# Altium PCB PCB3.PcbDoc (part 1 of 4)
Units mm, origin at the board's own origin, x right, y up, seen from the top; angles counter-clockwise.
Board outline 160 x 194 mm, 2 copper layers (Top Layer, Bottom Layer); 456 components, 297 nets, 1240 pads, 521 vias.
Unrouted connection lines stored in the file: 258.
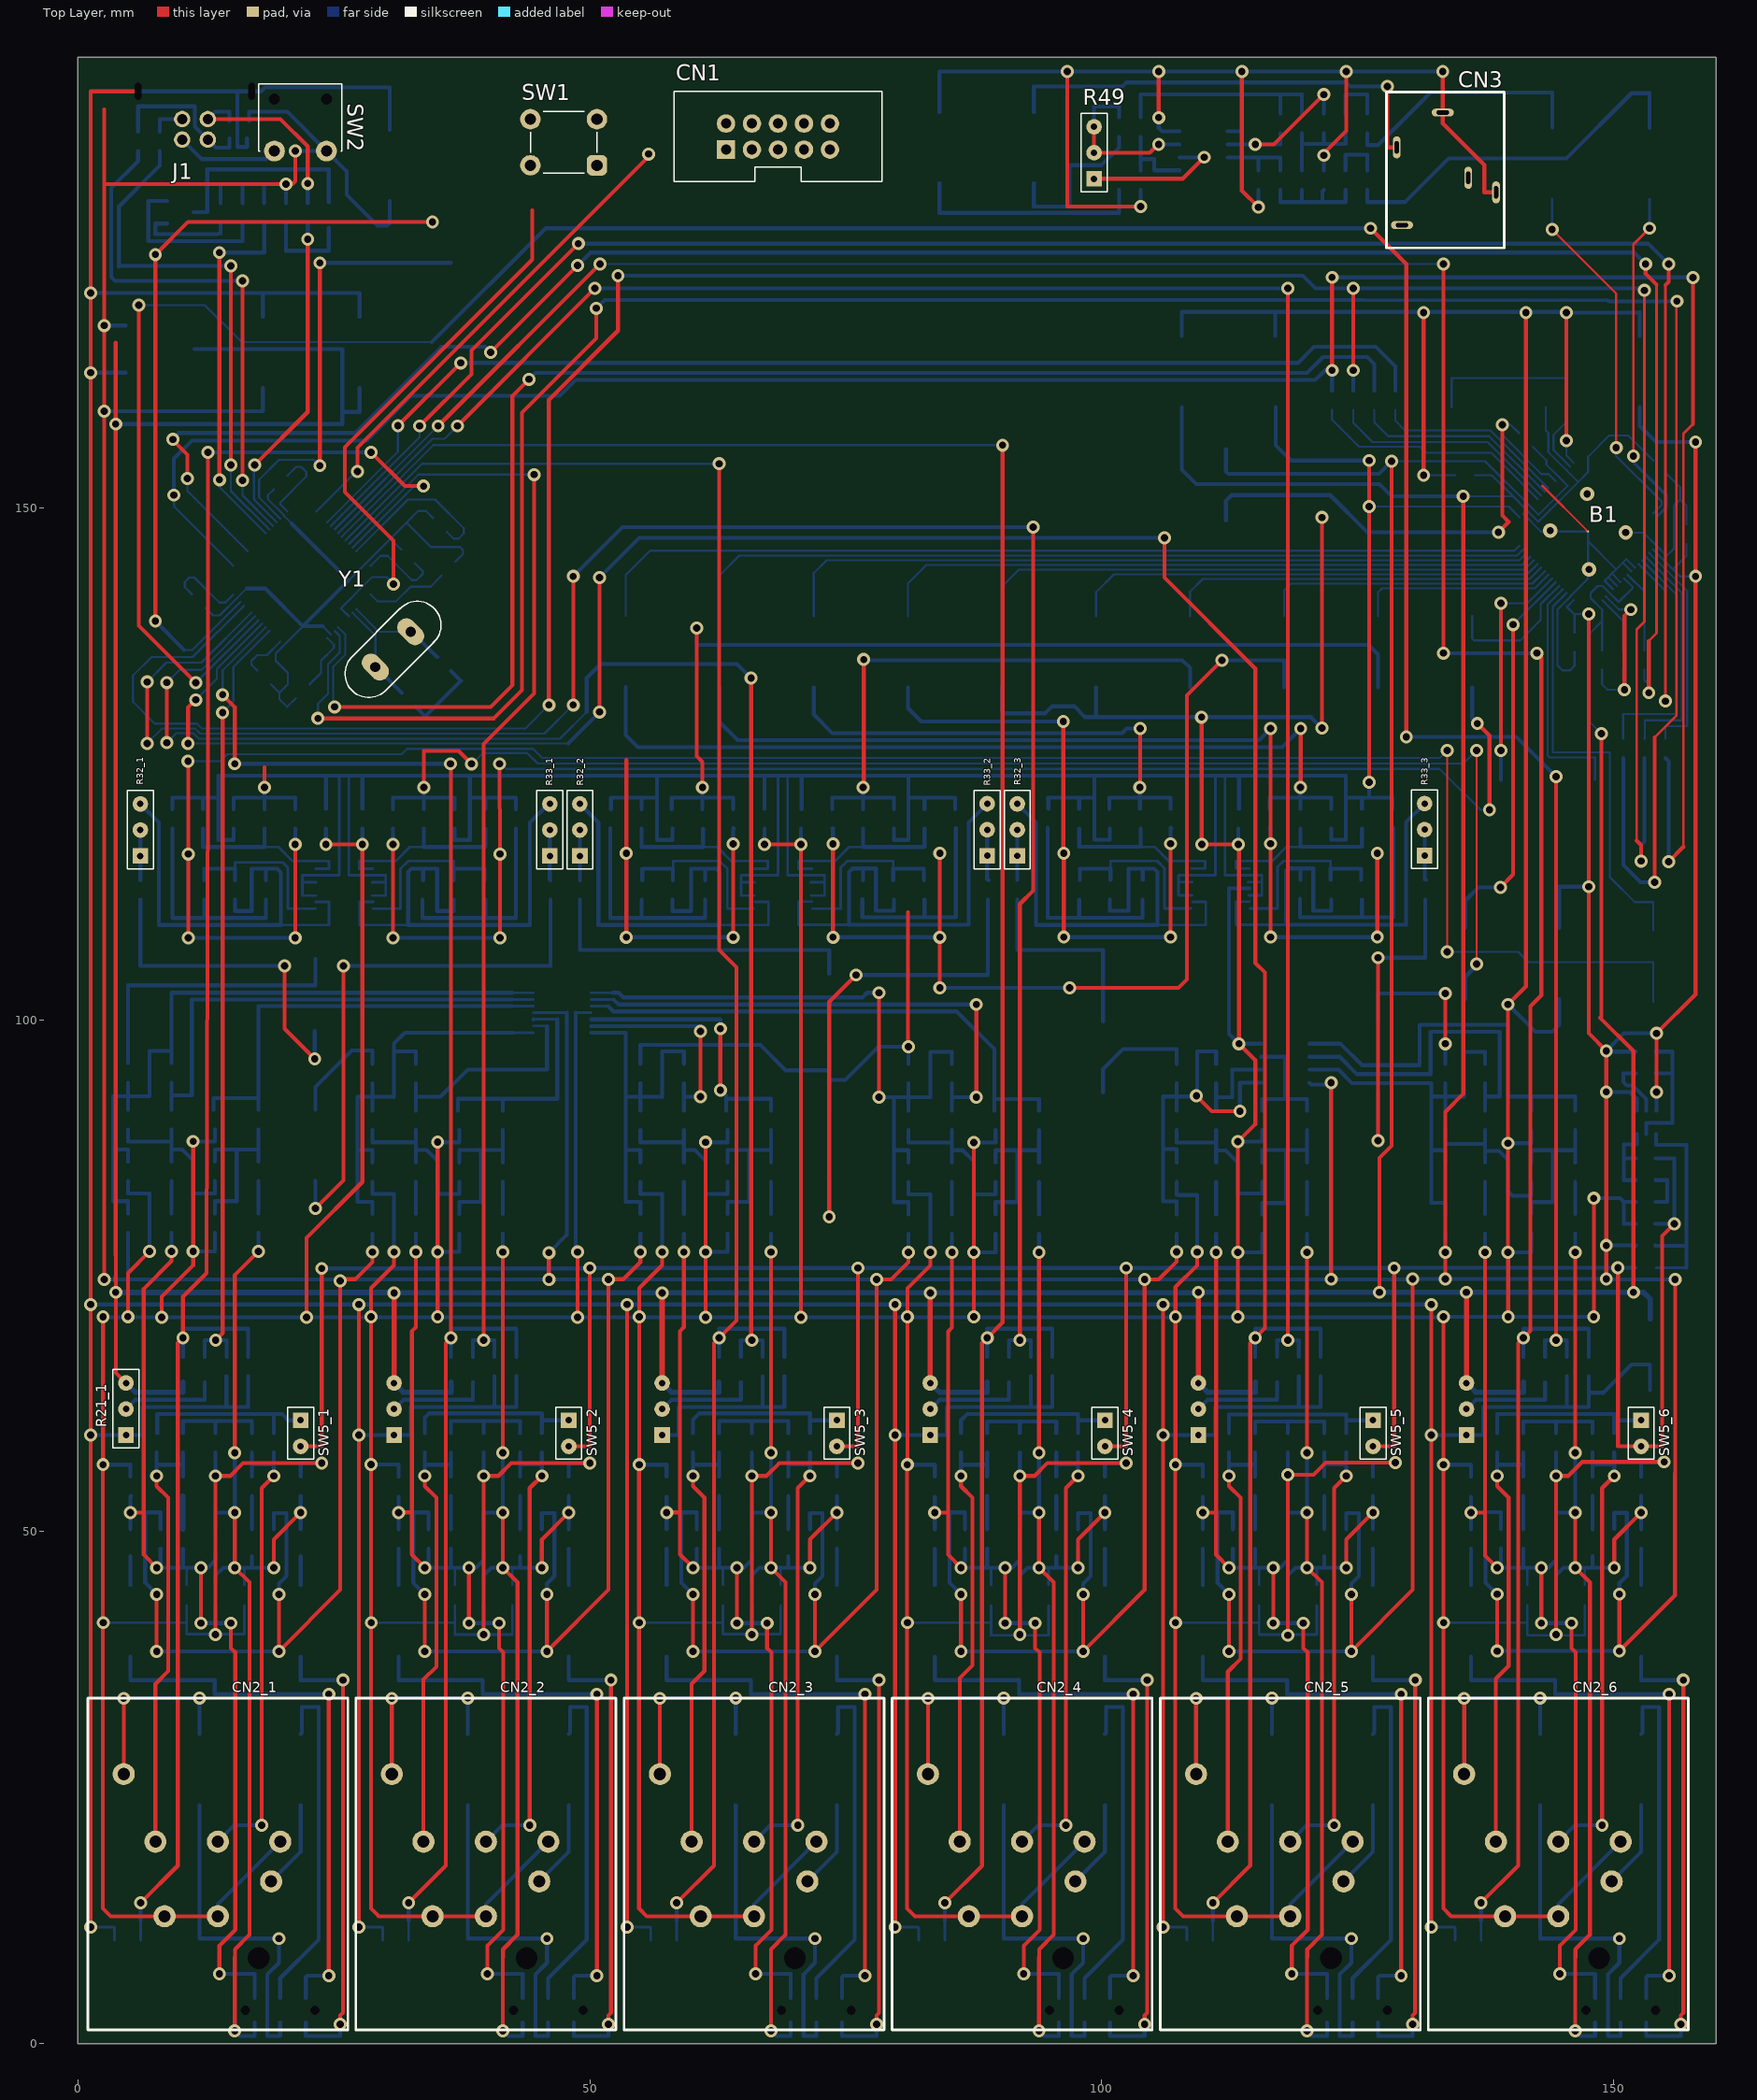
[diagram p0: Top Layer view]
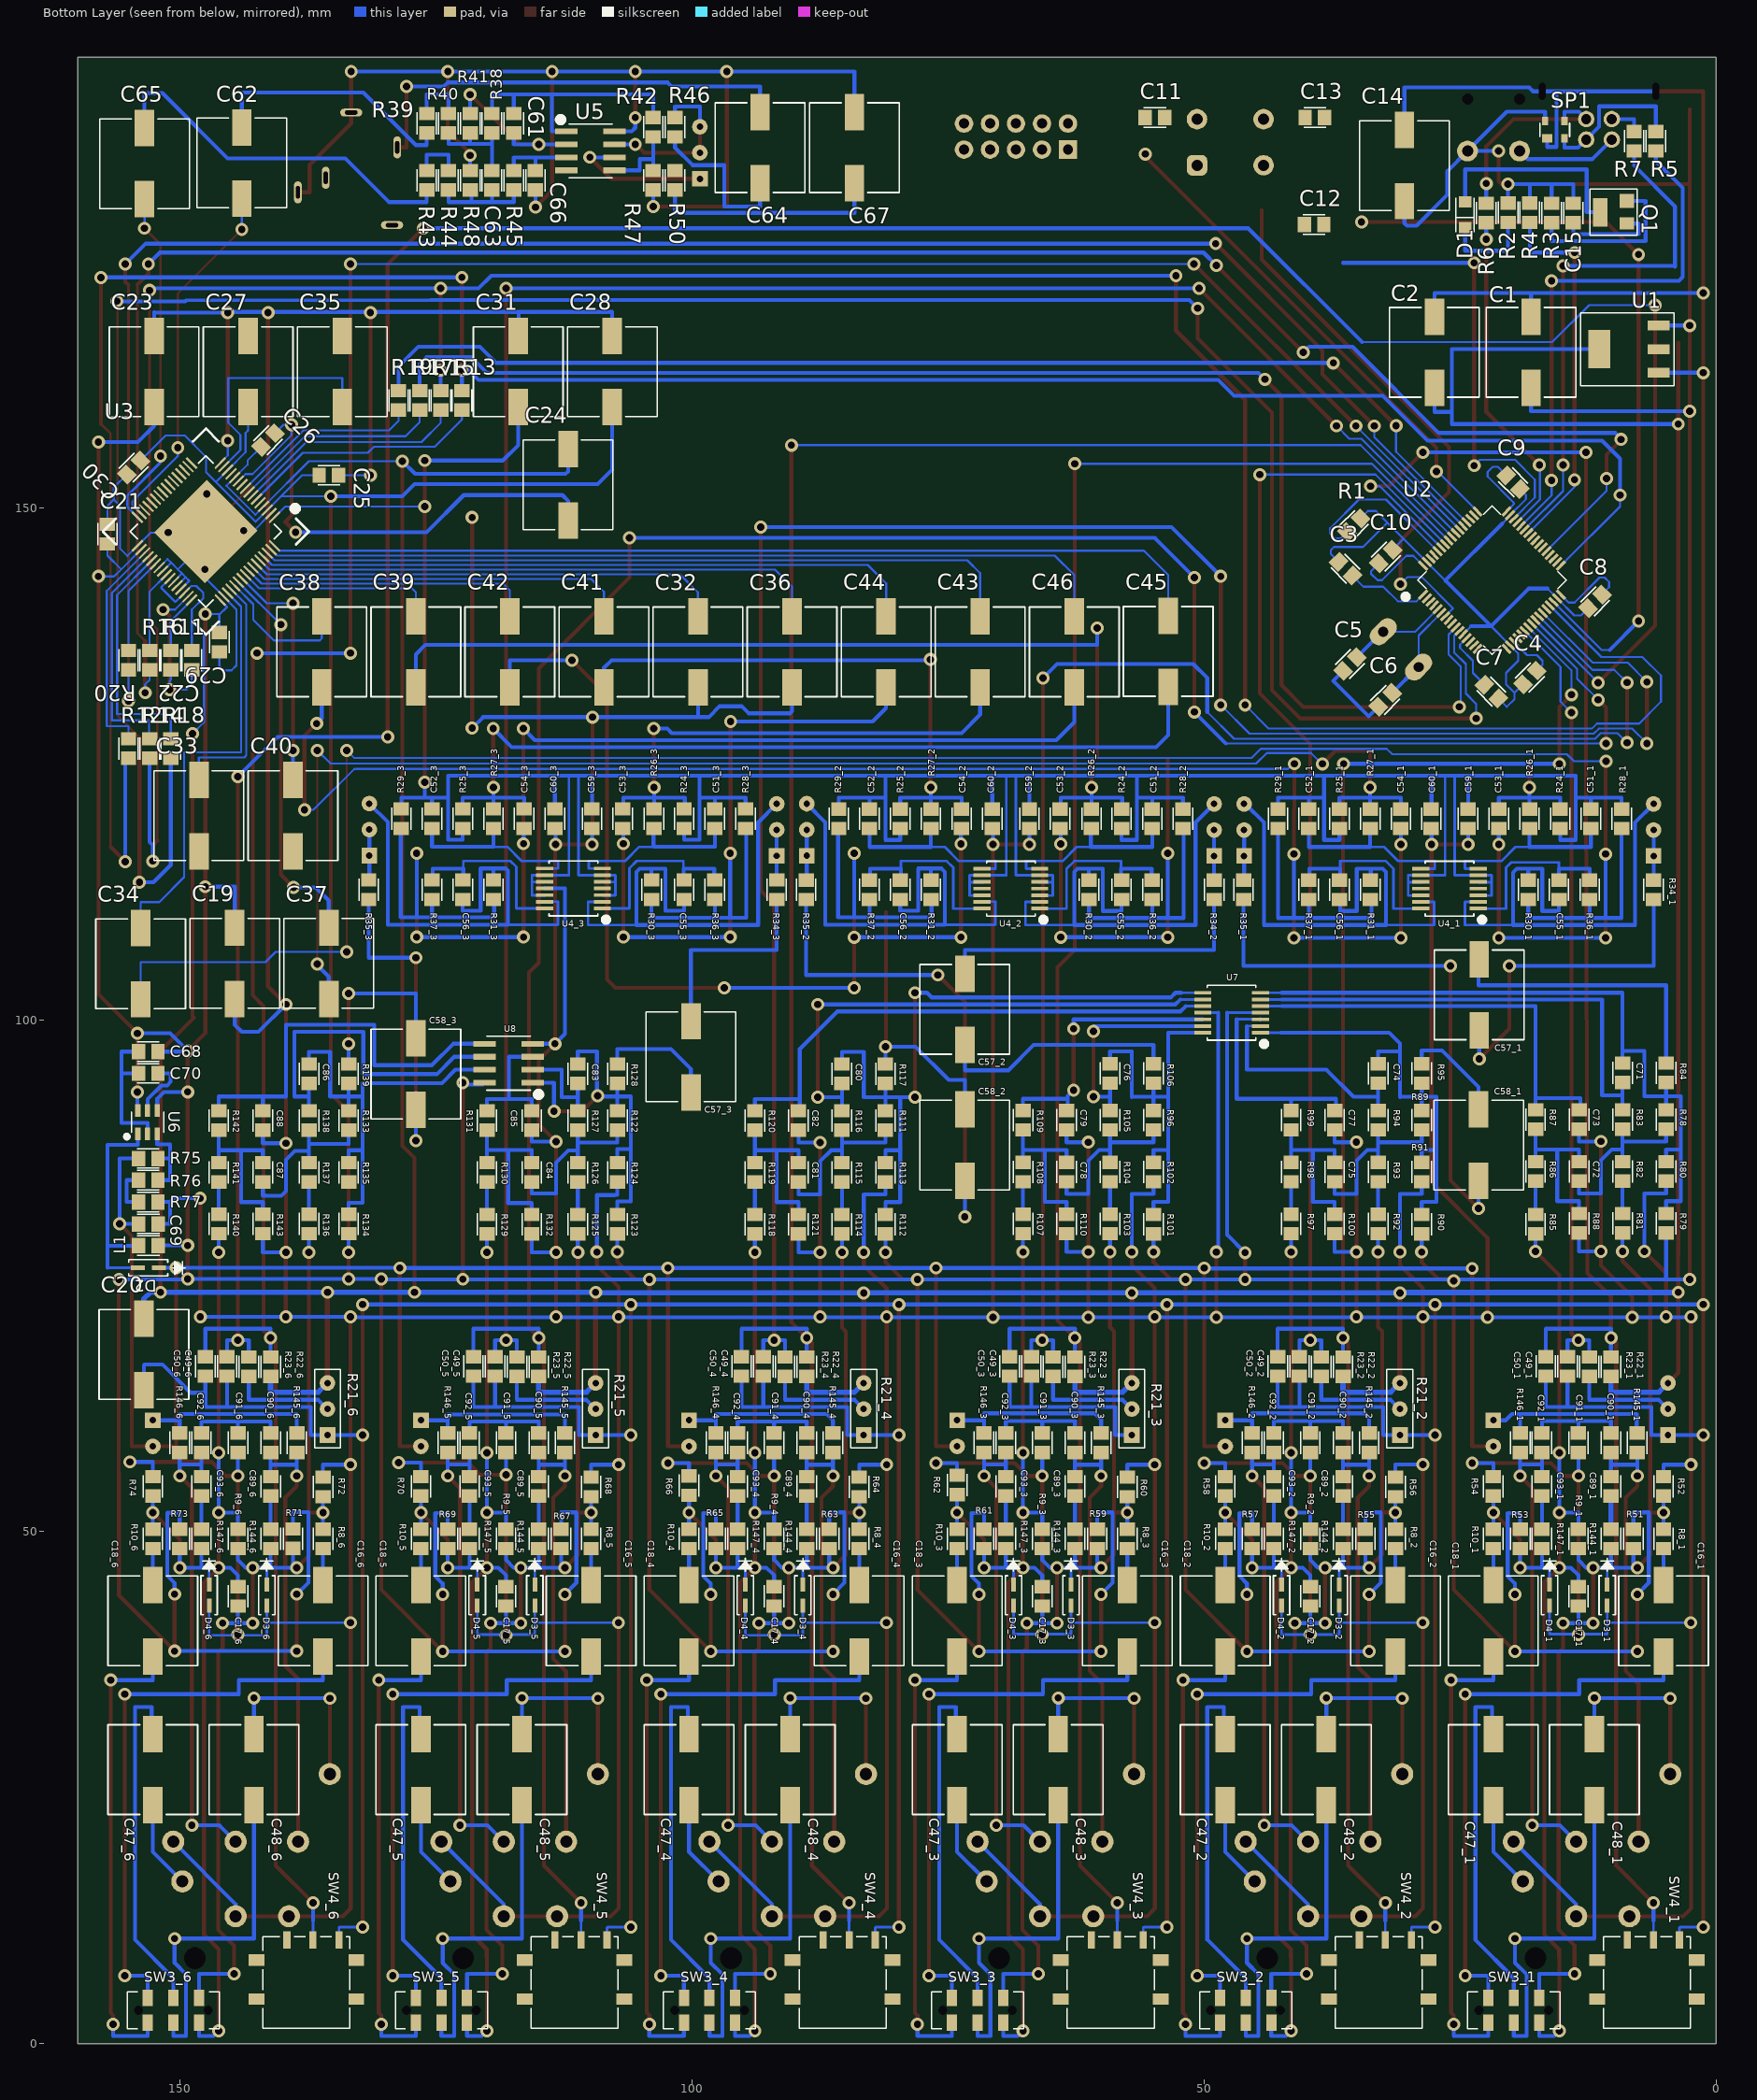
[diagram p1: Bottom Layer view, seen from below]
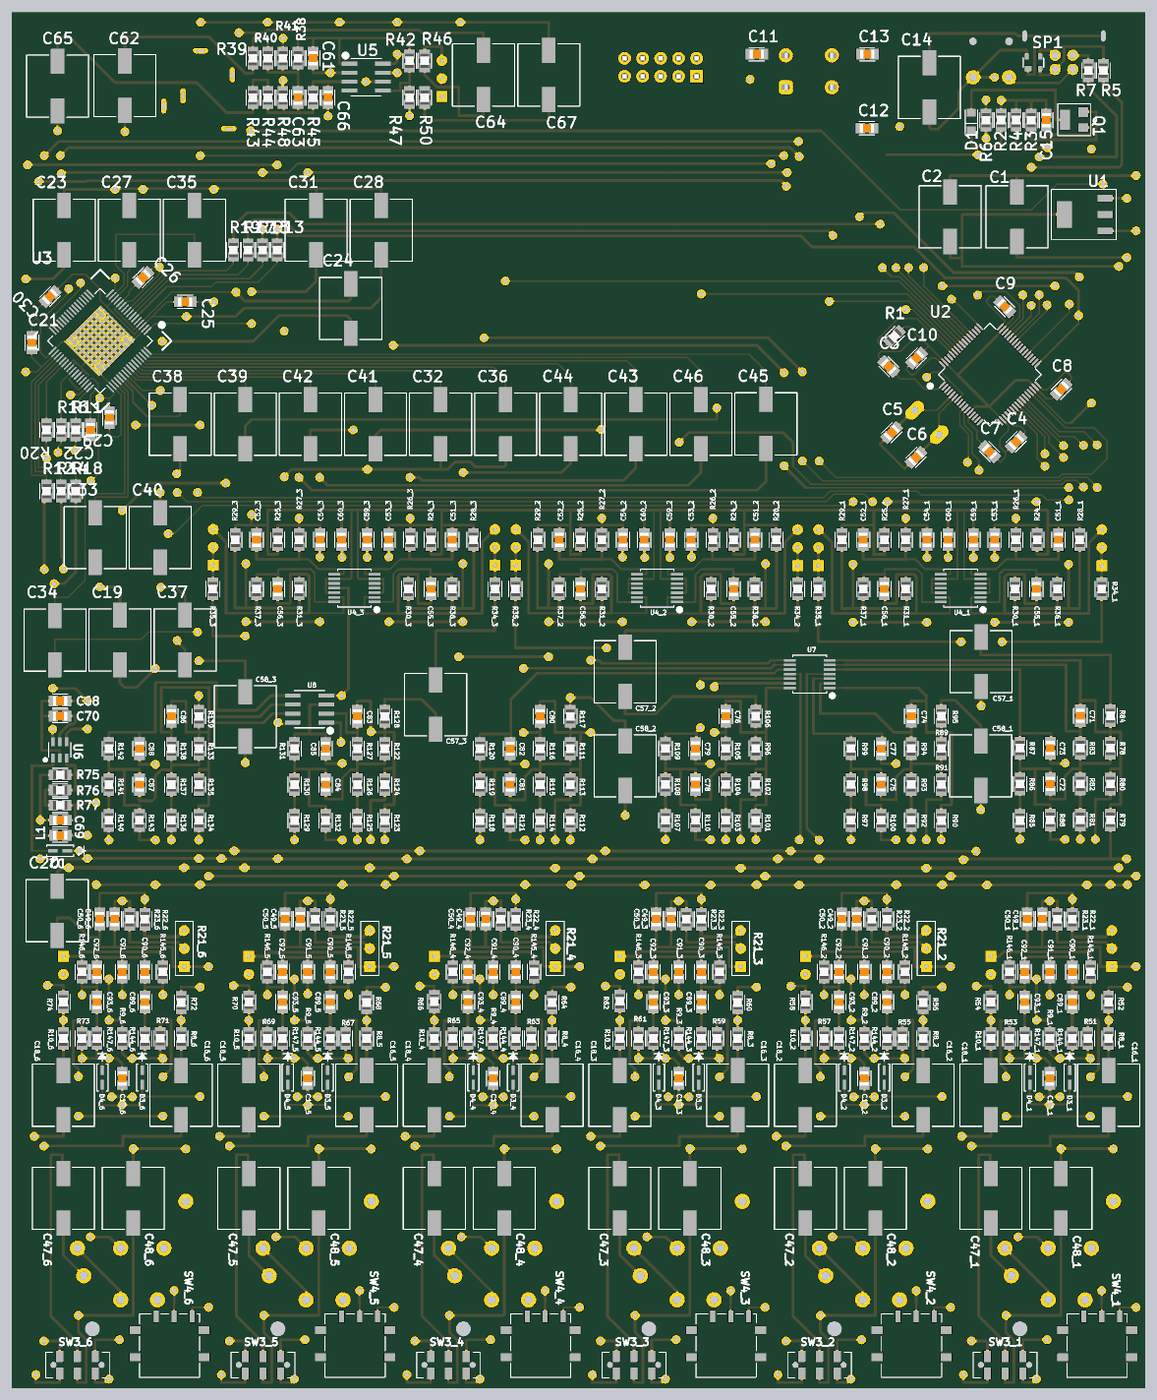
[diagram p5: 3D render of the assembled board from below, using the file's embedded part models]

## Layer stack, top to bottom
Top Solder: solder mask 0.0102, Solder Resist, Dk 3.5
Top Layer: signal copper 0.0356
Dielectric 1: dielectric 0.32, FR-4, Dk 4.8
Bottom Layer: signal copper 0.0356
Bottom Solder: solder mask 0.0102, Solder Resist, Dk 3.5

## Board outline
0,0 160,0 160,194 0,194 0,100

## Design rules (kind name [scope] priority, off if disabled: settings)
Clearance [All] p1: gap=0.203 ignorepadtopadclearanceinfootprint=TRUE
PolygonConnect [All] p1: connectstyle=Relief reliefconductorwidth=0.254 reliefentries=4 polygonreliefangle="90 Angle" airgapwidth=0.254
RoomDefinition U_phantom_power_enabler_3 [InComponentClass('U_phantom_power_enabler_3')] p1: confinementstyle=ConfineIn formatcopy=TRUE lockcomponents=FALSE outline 58.813,41.563 79.125,41.563 79.125,68.312 58.813,68.312
RoomDefinition U_phantom_power_enabler_2 [InComponentClass('U_phantom_power_enabler_2')] p2: confinementstyle=ConfineIn formatcopy=TRUE lockcomponents=FALSE outline 32.625,41.563 52.937,41.563 52.937,68.312 32.625,68.312
RoomDefinition U_input_output_2 [InComponentClass('U_input_output_2')] p3: confinementstyle=ConfineIn formatcopy=TRUE lockcomponents=FALSE outline 26.938,0.5 52.937,0.5 52.937,68 26.938,68
RoomDefinition U_phantom_power_enabler_6 [InComponentClass('U_phantom_power_enabler_6')] p4: confinementstyle=ConfineIn formatcopy=TRUE lockcomponents=FALSE outline 137.375,41.563 157.688,41.563 157.688,68.312 137.375,68.312
RoomDefinition U_phantom_power_enabler_5 [InComponentClass('U_phantom_power_enabler_5')] p5: confinementstyle=ConfineIn formatcopy=TRUE lockcomponents=FALSE outline 111.188,41.563 131.5,41.563 131.5,68.312 111.188,68.312
RoomDefinition U_phantom_power_enabler_4 [InComponentClass('U_phantom_power_enabler_4')] p6: confinementstyle=ConfineIn formatcopy=TRUE lockcomponents=FALSE outline 85,41.563 105.312,41.563 105.312,68.312 85,68.312
RoomDefinition U_input_output_6 [InComponentClass('U_input_output_6')] p7: confinementstyle=ConfineIn formatcopy=TRUE lockcomponents=FALSE outline 131.687,0.5 157.687,0.5 157.687,68 131.687,68
RoomDefinition U_input_output_5 [InComponentClass('U_input_output_5')] p8: confinementstyle=ConfineIn formatcopy=TRUE lockcomponents=FALSE outline 105.5,0.5 131.5,0.5 131.5,68 105.5,68
RoomDefinition U_input_output_4 [InComponentClass('U_input_output_4')] p9: confinementstyle=ConfineIn formatcopy=TRUE lockcomponents=FALSE outline 79.313,0.5 105.312,0.5 105.312,68 79.313,68
RoomDefinition U_input_output_3 [InComponentClass('U_input_output_3')] p10: confinementstyle=ConfineIn formatcopy=TRUE lockcomponents=FALSE outline 53.125,0.5 79.125,0.5 79.125,68 53.125,68
RoomDefinition U_att_17db_6 [InComponentClass('U_att_17db_6')] p11: confinementstyle=ConfineIn formatcopy=TRUE lockcomponents=FALSE outline 131.563,35.75 157.438,35.75 157.438,51.375 131.563,51.375
RoomDefinition U_att_17db_5 [InComponentClass('U_att_17db_5')] p12: confinementstyle=ConfineIn formatcopy=TRUE lockcomponents=FALSE outline 105.375,35.75 131.25,35.75 131.25,51.375 105.375,51.375
RoomDefinition U_att_17db_4 [InComponentClass('U_att_17db_4')] p13: confinementstyle=ConfineIn formatcopy=TRUE lockcomponents=FALSE outline 79.187,35.75 105.063,35.75 105.063,51.375 79.187,51.375
RoomDefinition U_att_17db_3 [InComponentClass('U_att_17db_3')] p14: confinementstyle=ConfineIn formatcopy=TRUE lockcomponents=FALSE outline 53,35.75 78.875,35.75 78.875,51.375 53,51.375
RoomDefinition U_att_17db_2 [InComponentClass('U_att_17db_2')] p15: confinementstyle=ConfineIn formatcopy=TRUE lockcomponents=FALSE outline 26.812,35.75 52.687,35.75 52.687,51.375 26.812,51.375
RoomDefinition U_input [InComponentClass('U_input')] p16: confinementstyle=ConfineIn formatcopy=TRUE lockcomponents=FALSE outline 3.75,36.625 158.875,36.625 158.875,56.813 3.75,56.813
RoomDefinition U_usb_2_0 [InComponentClass('U_usb_2_0')] p17: confinementstyle=ConfineIn formatcopy=TRUE lockcomponents=FALSE outline 0.5,171.5 35,171.5 35,191.562 0.5,191.562
RoomDefinition U_phantom_power_enabler_1 [InComponentClass('U_phantom_power_enabler_1')] p18: confinementstyle=ConfineIn formatcopy=TRUE lockcomponents=FALSE outline 6.438,41.563 26.75,41.563 26.75,68.312 6.438,68.312
RoomDefinition U_phantom_power [InComponentClass('U_phantom_power')] p19: confinementstyle=ConfineIn formatcopy=TRUE lockcomponents=FALSE outline 148.284,99.515 148.284,74.75 158.407,74.75 158.407,99.515
RoomDefinition U_output_jack [InComponentClass('U_output_jack')] p20: confinementstyle=ConfineIn formatcopy=TRUE lockcomponents=FALSE outline 79.687,175.187 158.062,175.187 158.062,193.312 79.687,193.312
RoomDefinition U_input_output_1 [InComponentClass('U_input_output_1')] p21: confinementstyle=ConfineIn formatcopy=TRUE lockcomponents=FALSE outline 0.75,0.5 26.75,0.5 26.75,68 0.75,68
RoomDefinition U_fuente [InComponentClass('U_fuente')] p22: confinementstyle=ConfineIn formatcopy=TRUE lockcomponents=FALSE outline 0.563,157.5 32.062,157.5 32.062,171.375 0.563,171.375
RoomDefinition U_bal2un_2 [InComponentClass('U_bal2un_2')] p23: confinementstyle=ConfineIn formatcopy=TRUE lockcomponents=FALSE outline 105.625,74.787 148.125,74.787 148.125,98.687 105.625,98.687
RoomDefinition U_bal2un_1 [InComponentClass('U_bal2un_1')] p24: confinementstyle=ConfineIn formatcopy=TRUE lockcomponents=FALSE outline 3.812,76.035 95.062,76.035 95.062,103.875 3.812,103.875
RoomDefinition U_att_17db_1 [InComponentClass('U_att_17db_1')] p25: confinementstyle=ConfineIn formatcopy=TRUE lockcomponents=FALSE outline 0.625,35.75 26.5,35.75 26.5,51.375 0.625,51.375
RoutingVias [All] p1: holewidth=0.711 width=1.27 viastyle="Through Hole" minholewidth=0.711 minwidth=1.27 maxholewidth=0.711 maxwidth=1.27
SolderMaskExpansion [All] p1: expansion=0.102
UnRoutedNet [All] p1: checkbadconnections=TRUE
Width [All] p1: maxlimit=2.54 minlimit=0.127 preferedwidth=0.254
29 further rules are at their usual default settings.

## Classes and differential pairs
channel class preamp: U_preamp_1 U_preamp_2 U_preamp_3
channel class phantom_power_enabler: U_phantom_power_enabler_1 U_phantom_power_enabler_2 U_phantom_power_enabler_3 U_phantom_power_enabler_4 U_phantom_power_enabler_5 U_phantom_power_enabler_6
channel class input_output: U_input_output_1 U_input_output_2 U_input_output_3 U_input_output_4 U_input_output_5 U_input_output_6
channel class att_17db: U_att_17db_1 U_att_17db_2 U_att_17db_3 U_att_17db_4 U_att_17db_5 U_att_17db_6
component class U_usb_2_0: C14 C15 D1 J1 Q1 R2 R3 R4 R5 R6 R7 SP1 SW2
component class U_stm32: C3 C4 C5 C6 C7 C8 C9 C10 C11 C12 C13 CN1 R1 SW1 U2 Y1
component class U_preamp_3: C51_3 C52_3 C53_3 C54_3 C55_3 C56_3 C57_3 C58_3 C59_3 C60_3 R24_3 R25_3 R26_3 R27_3 R28_3 R29_3 R30_3 R31_3 R32_3 R33_3 R34_3 R35_3 R36_3 R37_3 U4_3
component class U_preamp_2: C51_2 C52_2 C53_2 C54_2 C55_2 C56_2 C57_2 C58_2 C59_2 C60_2 R24_2 R25_2 R26_2 R27_2 R28_2 R29_2 R30_2 R31_2 R32_2 R33_2 R34_2 R35_2 R36_2 R37_2 U4_2
component class U_preamp_1: C51_1 C52_1 C53_1 C54_1 C55_1 C56_1 C57_1 C58_1 C59_1 C60_1 R24_1 R25_1 R26_1 R27_1 R28_1 R29_1 R30_1 R31_1 R32_1 R33_1 R34_1 R35_1 R36_1 R37_1 U4_1
component class U_phantom_power: C68 C69 C70 D2 L1 R75 R76 R77 U6
component class U_phantom_power_enabler_6: C89_6 C90_6 C91_6 C92_6 C93_6 D3_6 D4_6 R144_6 R145_6 R146_6 R147_6 SW5_6
component class U_phantom_power_enabler_5: C89_5 C90_5 C91_5 C92_5 C93_5 D3_5 D4_5 R144_5 R145_5 R146_5 R147_5 SW5_5
component class U_phantom_power_enabler_4: C89_4 C90_4 C91_4 C92_4 C93_4 D3_4 D4_4 R144_4 R145_4 R146_4 R147_4 SW5_4
component class U_phantom_power_enabler_3: C89_3 C90_3 C91_3 C92_3 C93_3 D3_3 D4_3 R144_3 R145_3 R146_3 R147_3 SW5_3
component class U_phantom_power_enabler_2: C89_2 C90_2 C91_2 C92_2 C93_2 D3_2 D4_2 R144_2 R145_2 R146_2 R147_2 SW5_2
component class U_phantom_power_enabler_1: C89_1 C90_1 C91_1 C92_1 C93_1 D3_1 D4_1 R144_1 R145_1 R146_1 R147_1 SW5_1
component class U_output_jack: C61 C62 C63 C64 C65 C66 C67 CN3 R38 R39 R40 R41 R42 R43 R44 R45 R46 R47 R48 R49 R50 U5
component class U_input: R51 R52 R53 R54 R55 R56 R57 R58 R59 R60 R61 R62 R63 R64 R65 R66 R67 R68 R69 R70 R71 R72 R73 R74
component class U_input_output_6: C47_6 C48_6 C49_6 C50_6 CN2_6 R21_6 R22_6 R23_6 SW3_6 SW4_6
component class U_input_output_5: C47_5 C48_5 C49_5 C50_5 CN2_5 R21_5 R22_5 R23_5 SW3_5 SW4_5
component class U_input_output_4: C47_4 C48_4 C49_4 C50_4 CN2_4 R21_4 R22_4 R23_4 SW3_4 SW4_4
component class U_input_output_3: C47_3 C48_3 C49_3 C50_3 CN2_3 R21_3 R22_3 R23_3 SW3_3 SW4_3
component class U_input_output_2: C47_2 C48_2 C49_2 C50_2 CN2_2 R21_2 R22_2 R23_2 SW3_2 SW4_2
component class U_input_output_1: C47_1 C48_1 C49_1 C50_1 CN2_1 R21_1 R22_1 R23_1 SW3_1 SW4_1
component class U_fuente: C1 C2 U1
component class U_codec: B1 C19 C20 C21 C22 C23 C24 C25 C26 C27 C28 C29 C30 C31 C32 C33 C34 C35 C36 C37 C38 C39 C40 C41 C42 C43 C44 C45 C46 R11 R12 R13 R14 R15 R16 R17 R18 R19 R20 U3
component class U_bal2un_2: C83 C84 C85 C86 C87 C88 R122 R123 R124 R125 R126 R127 R128 R129 R130 R131 R132 R133 R134 R135 R136 R137 R138 R139 R140 R141 R142 R143 U8
component class U_bal2un_1: C71 C72 C73 C74 C75 C76 C77 C78 C79 C80 C81 C82 R78 R79 R80 R81 R82 R83 R84 R85 R86 R87 R88 R89 R90 R91 R92 R93 R94 R95 R96 R97 R98 R99 R100 R101 R102 R103 R104 R105 R106 R107 R108 R109 R110 R111 R112 R113 R114 R115 R116 R117 R118 R119 R120 R121 U7
component class U_att_17db_6: C16_6 C17_6 C18_6 R8_6 R9_6 R10_6
component class U_att_17db_5: C16_5 C17_5 C18_5 R8_5 R9_5 R10_5
component class U_att_17db_4: C16_4 C17_4 C18_4 R8_4 R9_4 R10_4
component class U_att_17db_3: C16_3 C17_3 C18_3 R8_3 R9_3 R10_3
component class U_att_17db_2: C16_2 C17_2 C18_2 R8_2 R9_2 R10_2
component class U_att_17db_1: C16_1 C17_1 C18_1 R8_1 R9_1 R10_1

## Components (designator, comment, footprint, x,y, rotation, side; value= is the part's Value field where it differs from the comment)
B1 "GND_BIND" Track_8mil 147.5,147.687 r135 top
C1 "Capacitor polarizado" CAP_ELECTROLYTIC 18.062,165.188 r90 bottom
C2 "Capacitor polarizado" CAP_ELECTROLYTIC 27.5,165.188 r90 bottom
C3 "Capacitor" C0805 36.187,144.063 r45 bottom
C4 "Capacitor" C0805 18.187,133.438 r315 bottom
C5 "Capacitor" C0805 35.75,134.75 r135 bottom
C6 "Capacitor" C0805 32.313,131.25 r135 bottom
C7 "Capacitor" C0805 21.937,132.062 r225 bottom
C8 "Capacitor" C0805 11.813,140.875 r315 bottom
C9 "Capacitor" C0805 19.813,152.5 r225 bottom
C10 "Capacitor" C0805 32.25,145.25 r135 bottom
C11 "Capacitor" C0805 54.807,188.125 r180 bottom
C12 "Capacitor" C0805 39.25,177.688 r180 bottom
C13 "Capacitor" C0805 39.186,188.125 r180 bottom
C14 "Capacitor polarizado" CAP_ELECTROLYTIC 30.438,183.438 r90 bottom
C15 "Capacitor" C0805 13.938,178.813 r270 bottom
C16_1 "Capacitor polarizado" CAP_ELECTROLYTIC 5.125,41.292 r270 bottom (schematic designator C16)
C16_2 "Capacitor polarizado" CAP_Electrolytic 31.313,41.292 r270 bottom (schematic designator C16)
C16_3 "Capacitor polarizado" CAP_Electrolytic 57.5,41.292 r270 bottom (schematic designator C16)
C16_4 "Capacitor polarizado" CAP_Electrolytic 83.688,41.292 r270 bottom (schematic designator C16)
C16_5 "Capacitor polarizado" CAP_Electrolytic 109.875,41.292 r270 bottom (schematic designator C16)
C16_6 "Capacitor polarizado" CAP_Electrolytic 136.063,41.292 r270 bottom (schematic designator C16)
C17_1 "Capacitor" C0805 13.437,43.667 r90 bottom (schematic designator C17)
C17_2 "Capacitor" C0805 39.625,43.667 r90 bottom (schematic designator C17)
C17_3 "Capacitor" C0805 65.812,43.667 r90 bottom (schematic designator C17)
C17_4 "Capacitor" C0805 92,43.667 r90 bottom (schematic designator C17)
C17_5 "Capacitor" C0805 118.187,43.667 r90 bottom (schematic designator C17)
C17_6 "Capacitor" C0805 144.375,43.667 r90 bottom (schematic designator C17)
C18_1 "Capacitor polarizado" CAP_ELECTROLYTIC 21.75,41.292 r270 bottom (schematic designator C18)
C18_2 "Capacitor polarizado" CAP_Electrolytic 47.937,41.292 r270 bottom (schematic designator C18)
C18_3 "Capacitor polarizado" CAP_Electrolytic 74.125,41.292 r270 bottom (schematic designator C18)
C18_4 "Capacitor polarizado" CAP_Electrolytic 100.312,41.292 r270 bottom (schematic designator C18)
C18_5 "Capacitor polarizado" CAP_Electrolytic 126.5,41.292 r270 bottom (schematic designator C18)
C18_6 "Capacitor polarizado" CAP_Electrolytic 152.688,41.292 r270 bottom (schematic designator C18)
C19 "Capacitor polarizado" CAP_ELECTROLYTIC 144.688,105.5 r270 bottom
C20 "Capacitor polarizado" CAP_ELECTROLYTIC 153.562,67.312 r270 bottom
C21 "Capacitor" C0805 157.125,147.438 r90 bottom
C22 "Capacitor" C0805 148.875,135.125 r270 bottom
C23 "Capacitor polarizado" CAP_ELECTROLYTIC 152.562,163.313 r90 bottom
C24 "Capacitor polarizado" CAP_ELECTROLYTIC 112.125,152.25 r270 bottom
C25 "Capacitor" C0805 135.5,153.187 r180 bottom
C26 "Capacitor" C0805 141.437,156.625 r135 bottom
C27 "Capacitor polarizado" CAP_ELECTROLYTIC 143.375,163.313 r90 bottom
C28 "Capacitor polarizado" CAP_ELECTROLYTIC 107.812,163.313 r90 bottom
C29 "Capacitor" C0805 146.188,136.875 r270 bottom
C30 "Capacitor" C0805 154.563,153.938 r315 bottom
C31 "Capacitor polarizado" CAP_ELECTROLYTIC 117,163.312 r90 bottom
C32 "Capacitor polarizado" CAP_ELECTROLYTIC 99.438,135.938 r270 bottom
C33 "Capacitor polarizado" CAP_ELECTROLYTIC 148.187,119.938 r90 bottom
C34 "Capacitor polarizado" CAP_ELECTROLYTIC 153.875,105.48 r90 bottom
C35 "Capacitor polarizado" CAP_ELECTROLYTIC 134.187,163.313 r90 bottom
C36 "Capacitor polarizado" CAP_ELECTROLYTIC 90.25,135.938 r270 bottom
C37 "Capacitor polarizado" CAP_ELECTROLYTIC 135.5,105.5 r90 bottom
C38 "Capacitor polarizado" CAP_ELECTROLYTIC 136.188,135.938 r90 bottom
C39 "Capacitor polarizado" CAP_ELECTROLYTIC 127,135.938 r90 bottom
C40 "Capacitor polarizado" CAP_ELECTROLYTIC 139,119.938 r90 bottom
C41 "Capacitor polarizado" CAP_ELECTROLYTIC 108.625,135.938 r90 bottom
C42 "Capacitor polarizado" CAP_ELECTROLYTIC 117.813,135.938 r90 bottom
C43 "Capacitor polarizado" CAP_ELECTROLYTIC 71.875,135.938 r90 bottom
C44 "Capacitor polarizado" CAP_ELECTROLYTIC 81.063,135.938 r90 bottom
C45 "Capacitor polarizado" CAP_ELECTROLYTIC 53.5,135.98 r90 bottom
C46 "Capacitor polarizado" CAP_ELECTROLYTIC 62.687,135.938 r90 bottom
C47_1 "Capacitor polarizado" CAP_ELECTROLYTIC 21.75,26.75 r270 bottom (schematic designator C47)
C47_2 "Capacitor polarizado" CAP_Electrolytic 47.937,26.75 r270 bottom (schematic designator C47)
C47_3 "Capacitor polarizado" CAP_Electrolytic 74.125,26.75 r270 bottom (schematic designator C47)
C47_4 "Capacitor polarizado" CAP_Electrolytic 100.312,26.75 r270 bottom (schematic designator C47)
C47_5 "Capacitor polarizado" CAP_Electrolytic 126.5,26.75 r270 bottom (schematic designator C47)
C47_6 "Capacitor polarizado" CAP_Electrolytic 152.687,26.75 r270 bottom (schematic designator C47)
C48_1 "Capacitor polarizado" CAP_ELECTROLYTIC 11.875,26.75 r90 bottom (schematic designator C48)
C48_2 "Capacitor polarizado" CAP_Electrolytic 38.062,26.75 r90 bottom (schematic designator C48)
C48_3 "Capacitor polarizado" CAP_Electrolytic 64.25,26.75 r90 bottom (schematic designator C48)
C48_4 "Capacitor polarizado" CAP_Electrolytic 90.438,26.75 r90 bottom (schematic designator C48)
C48_5 "Capacitor polarizado" CAP_Electrolytic 116.625,26.75 r90 bottom (schematic designator C48)
C48_6 "Capacitor polarizado" CAP_Electrolytic 142.812,26.75 r90 bottom (schematic designator C48)
C49_1 "Capacitor" C0805 14.5,66.135 r270 bottom (schematic designator C49)
C49_2 "Capacitor" C0805 40.688,66.135 r270 bottom (schematic designator C49)
C49_3 "Capacitor" C0805 66.875,66.135 r270 bottom (schematic designator C49)
C49_4 "Capacitor" C0805 93.063,66.135 r270 bottom (schematic designator C49)
C49_5 "Capacitor" C0805 119.25,66.135 r270 bottom (schematic designator C49)
C49_6 "Capacitor" C0805 145.437,66.135 r270 bottom (schematic designator C49)
C50_1 "Capacitor" C0805 16.625,66.135 r270 bottom (schematic designator C50)
C50_2 "Capacitor" C0805 42.813,66.135 r270 bottom (schematic designator C50)
C50_3 "Capacitor" C0805 69,66.135 r270 bottom (schematic designator C50)
C50_4 "Capacitor" C0805 95.188,66.135 r270 bottom (schematic designator C50)
C50_5 "Capacitor" C0805 121.375,66.135 r270 bottom (schematic designator C50)
C50_6 "Capacitor" C0805 147.563,66.135 r270 bottom (schematic designator C50)
C51_1 "Capacitor" C0805 12.216,119.625 r90 bottom (schematic designator C51)
C51_2 "Capacitor" C0805 55.063,119.625 r90 bottom (schematic designator C51)
C51_3 "Capacitor" C0805 97.791,119.638 r90 bottom (schematic designator C51)
C52_1 "Capacitor" C0805 39.778,119.625 r90 bottom (schematic designator C52)
C52_2 "Capacitor" C0805 82.688,119.625 r90 bottom (schematic designator C52)
C52_3 "Capacitor" C0805 125.416,119.638 r90 bottom (schematic designator C52)
C53_1 "Capacitor" C0805 21.216,119.625 r270 bottom (schematic designator C53)
C53_2 "Capacitor" C0805 64.063,119.625 r270 bottom (schematic designator C53)
C53_3 "Capacitor" C0805 106.791,119.638 r270 bottom (schematic designator C53)
C54_1 "Capacitor" C0805 30.778,119.625 r270 bottom (schematic designator C54)
C54_2 "Capacitor" C0805 73.688,119.625 r270 bottom (schematic designator C54)
C54_3 "Capacitor" C0805 116.416,119.638 r270 bottom (schematic designator C54)
C55_1 "Capacitor" C0805 15.341,112.687 r270 bottom (schematic designator C55)
C55_2 "Capacitor" C0805 58.063,112.687 r270 bottom (schematic designator C55)
C55_3 "Capacitor" C0805 100.791,112.7 r270 bottom (schematic designator C55)
C56_1 "Capacitor" C0805 36.778,112.687 r270 bottom (schematic designator C56)
C56_2 "Capacitor" C0805 79.688,112.687 r270 bottom (schematic designator C56)
C56_3 "Capacitor" C0805 122.416,112.7 r270 bottom (schematic designator C56)
C57_1 "Capacitor polarizado" CAP_ELECTROLYTIC 23.125,102.437 r90 bottom (schematic designator C57)
C57_2 "Capacitor polarizado" CAP_ELECTROLYTIC 73.375,101.02 r270 bottom (schematic designator C57)
C57_3 "Capacitor polarizado" CAP_ELECTROLYTIC 100.125,96.375 r270 bottom (schematic designator C57)
C58_1 "Capacitor polarizado" CAP_ELECTROLYTIC 23.188,87.75 r90 bottom (schematic designator C58)
C58_2 "Capacitor polarizado" CAP_ELECTROLYTIC 73.375,87.75 r90 bottom (schematic designator C58)
C58_3 "Capacitor polarizado" CAP_ELECTROLYTIC 127,94.687 r90 bottom (schematic designator C58)
C59_1 "Capacitor" C0805 24.216,119.625 r270 bottom (schematic designator C59)
C59_2 "Capacitor" C0805 67.063,119.625 r270 bottom (schematic designator C59)
C59_3 "Capacitor" C0805 109.791,119.638 r270 bottom (schematic designator C59)
C60_1 "Capacitor" C0805 27.812,119.625 r270 bottom (schematic designator C60)
C60_2 "Capacitor" C0805 70.688,119.625 r270 bottom (schematic designator C60)
C60_3 "Capacitor" C0805 113.416,119.638 r270 bottom (schematic designator C60)
C61 "Capacitor" C0805 117.437,187.562 r270 bottom
C62 "Capacitor polarizado" CAP_ELECTROLYTIC 144,183.687 r270 bottom
C63 "Capacitor" C0805 119.562,182 r270 bottom
C64 "Capacitor polarizado" CAP_ELECTROLYTIC 93.375,185.187 r90 bottom
C65 "Capacitor polarizado" CAP_ELECTROLYTIC 153.5,183.625 r270 bottom
C66 "Capacitor" C0805 115.312,182 r270 bottom
C67 "Capacitor polarizado" CAP_ELECTROLYTIC 84.152,185.187 r90 bottom
C68 "Capacitor" C0805 153.137,96.89 r0 bottom
C69 "Capacitor" C0805 153.125,80.062 r180 bottom
C70 "Capacitor" C0805 153.137,94.765 r0 bottom
C71 "Capacitor" C0805 9.125,94.813 r270 bottom
C72 "Capacitor" C0805 13.375,85.188 r90 bottom
C73 "Capacitor" C0805 13.375,90.25 r270 bottom
C74 "Capacitor" C0805 33,94.75 r270 bottom
C75 "Capacitor" C0805 37.25,85.125 r90 bottom
C76 "Capacitor" C0805 59.188,94.75 r270 bottom
C77 "Capacitor" C0805 37.25,90.188 r270 bottom
C78 "Capacitor" C0805 63.438,85.125 r90 bottom
C79 "Capacitor" C0805 63.438,90.188 r270 bottom
C80 "Capacitor" C0805 85.375,94.725 r270 bottom
C81 "Capacitor" C0805 89.625,85.1 r90 bottom
C82 "Capacitor" C0805 89.625,90.162 r270 bottom
C83 "Capacitor" C0805 111.174,94.725 r270 bottom
C84 "Capacitor" C0805 115.674,85.1 r90 bottom
C85 "Capacitor" C0805 115.674,90.162 r270 bottom
C86 "Capacitor" C0805 137.438,94.725 r270 bottom
C87 "Capacitor" C0805 141.938,85.1 r90 bottom
C88 "Capacitor" C0805 141.938,90.162 r270 bottom
C89_1 "Capacitor" C0805 10.25,54.43 r270 bottom (schematic designator C89)
C89_2 "Capacitor" C0805 36.43,54.43 r270 bottom (schematic designator C89)
C89_3 "Capacitor" C0805 62.617,54.43 r270 bottom (schematic designator C89)
C89_4 "Capacitor" C0805 88.805,54.43 r270 bottom (schematic designator C89)
C89_5 "Capacitor" C0805 114.992,54.43 r270 bottom (schematic designator C89)
C89_6 "Capacitor" C0805 141.18,54.43 r270 bottom (schematic designator C89)
C90_1 "Capacitor" C0805 10.25,58.68 r90 bottom (schematic designator C90)
C90_2 "Capacitor" C0805 36.43,58.68 r90 bottom (schematic designator C90)
C90_3 "Capacitor" C0805 62.617,58.68 r90 bottom (schematic designator C90)
C90_4 "Capacitor" C0805 88.805,58.68 r90 bottom (schematic designator C90)
C90_5 "Capacitor" C0805 114.992,58.68 r90 bottom (schematic designator C90)
C90_6 "Capacitor" C0805 141.18,58.68 r90 bottom (schematic designator C90)
C91_1 "Capacitor" C0805 13.437,58.68 r270 bottom (schematic designator C91)
C91_2 "Capacitor" C0805 39.625,58.68 r270 bottom (schematic designator C91)
C91_3 "Capacitor" C0805 65.812,58.68 r270 bottom (schematic designator C91)
C91_4 "Capacitor" C0805 92,58.68 r270 bottom (schematic designator C91)
C91_5 "Capacitor" C0805 118.188,58.68 r270 bottom (schematic designator C91)
C91_6 "Capacitor" C0805 144.375,58.68 r270 bottom (schematic designator C91)
C92_1 "Capacitor" C0805 17,58.68 r270 bottom (schematic designator C92)
C92_2 "Capacitor" C0805 43.188,58.68 r270 bottom (schematic designator C92)
C92_3 "Capacitor" C0805 69.375,58.68 r270 bottom (schematic designator C92)
C92_4 "Capacitor" C0805 95.563,58.68 r270 bottom (schematic designator C92)
C92_5 "Capacitor" C0805 121.75,58.68 r270 bottom (schematic designator C92)
C92_6 "Capacitor" C0805 147.938,58.68 r270 bottom (schematic designator C92)
C93_1 "Capacitor" C0805 17,54.43 r270 bottom (schematic designator C93)
C93_2 "Capacitor" C0805 43.188,54.43 r270 bottom (schematic designator C93)
C93_3 "Capacitor" C0805 69.375,54.43 r270 bottom (schematic designator C93)
C93_4 "Capacitor" C0805 95.563,54.43 r270 bottom (schematic designator C93)
C93_5 "Capacitor" C0805 121.75,54.43 r270 bottom (schematic designator C93)
C93_6 "Capacitor" C0805 147.938,54.43 r270 bottom (schematic designator C93)
CN1 "STLINK V2 Mini_2" IDC10M 68.375,186.27 r0 top
CN2_1 "XRL_Jack_Combo_stereo" "Combo XLR Jack" 13.66,1.328 r90 top (schematic designator CN2)
CN2_2 "XRL_Jack_Combo_stereo" "Combo XLR Jack" 39.847,1.328 r90 top (schematic designator CN2)
CN2_3 "XRL_Jack_Combo_stereo" "Combo XLR Jack" 66.035,1.328 r90 top (schematic designator CN2)
CN2_4 "XRL_Jack_Combo_stereo" "Combo XLR Jack" 92.222,1.328 r90 top (schematic designator CN2)
CN2_5 "XRL_Jack_Combo_stereo" "Combo XLR Jack" 118.41,1.328 r90 top (schematic designator CN2)
CN2_6 "XRL_Jack_Combo_stereo" "Combo XLR Jack" 144.597,1.328 r90 top (schematic designator CN2)
CN3 "jack_3.5mm" "Jack 3.5mm" 133.312,190.625 r270 top
D1 "Led color" SMD_0805_Diodo 24.5,179.875 r270 bottom
D2 "PMEG6010" SOD128 153.137,75.765 r0 bottom
D3_1 "PMEG6010" SOD128 10.625,43.792 r270 bottom (schematic designator D3)
D3_2 "PMEG6010" SOD128 36.812,43.792 r270 bottom (schematic designator D3)
D3_3 "PMEG6010" SOD128 63,43.792 r270 bottom (schematic designator D3)
D3_4 "PMEG6010" SOD128 89.188,43.792 r270 bottom (schematic designator D3)
D3_5 "PMEG6010" SOD128 115.375,43.792 r270 bottom (schematic designator D3)
D3_6 "PMEG6010" SOD128 141.563,43.792 r270 bottom (schematic designator D3)
D4_1 "PMEG6010" SOD128 16.25,43.792 r270 bottom (schematic designator D4)
D4_2 "PMEG6010" SOD128 42.437,43.792 r270 bottom (schematic designator D4)
D4_3 "PMEG6010" SOD128 68.625,43.792 r270 bottom (schematic designator D4)
D4_4 "PMEG6010" SOD128 94.813,43.792 r270 bottom (schematic designator D4)
D4_5 "PMEG6010" SOD128 121,43.792 r270 bottom (schematic designator D4)
D4_6 "PMEG6010" SOD128 147.188,43.792 r270 bottom (schematic designator D4)
J1 "Micro_USB" "USB Type B" 11.425,188.333 r180 top
L1 "0.68nH" L0805 153.125,77.937 r0 bottom
Q1 "BC817" SOT23 10,178.875 r90 bottom
R1 "Resistor" R0805 35.375,148.312 r315 bottom
R2 "Resistor" R0805 20.31,178.83 r90 bottom
R3 "Resistor" R0805 16.062,178.812 r90 bottom
R4 "Resistor" R0805 18.188,178.83 r270 bottom
R5 "Resistor" R0805 5.875,185.813 r270 bottom
R6 "Resistor" R0805 22.438,178.812 r270 bottom
R7 "Resistor" R0805 8,185.813 r270 bottom
R8_1 "Resistor" R0805 5.125,49.292 r90 bottom (schematic designator R8)
R8_2 "Resistor" R0805 31.313,49.292 r90 bottom (schematic designator R8)
R8_3 "Resistor" R0805 57.5,49.292 r90 bottom (schematic designator R8)
R8_4 "Resistor" R0805 83.688,49.292 r90 bottom (schematic designator R8)
R8_5 "Resistor" R0805 109.875,49.292 r90 bottom (schematic designator R8)
R8_6 "Resistor" R0805 136.063,49.292 r90 bottom (schematic designator R8)
R9_1 "Resistor" R0805 13.437,49.292 r270 bottom (schematic designator R9)
R9_2 "Resistor" R0805 39.625,49.292 r270 bottom (schematic designator R9)
R9_3 "Resistor" R0805 65.812,49.292 r270 bottom (schematic designator R9)
R9_4 "Resistor" R0805 92,49.292 r270 bottom (schematic designator R9)
R9_5 "Resistor" R0805 118.187,49.292 r270 bottom (schematic designator R9)
R9_6 "Resistor" R0805 144.375,49.292 r270 bottom (schematic designator R9)
R10_1 "Resistor" R0805 21.75,49.292 r90 bottom (schematic designator R10)
R10_2 "Resistor" R0805 47.937,49.292 r90 bottom (schematic designator R10)
R10_3 "Resistor" R0805 74.125,49.292 r90 bottom (schematic designator R10)
R10_4 "Resistor" R0805 100.312,49.292 r90 bottom (schematic designator R10)
R10_5 "Resistor" R0805 126.5,49.292 r90 bottom (schematic designator R10)
R10_6 "Resistor" R0805 152.688,49.292 r90 bottom (schematic designator R10)
R11 "Resistor" R0805 150.937,135.125 r90 bottom
R12 "Resistor" R0805 155.062,126.5 r270 bottom
R13 "Resistor" R0805 122.5,160.5 r270 bottom
R14 "Resistor" R0805 153,126.5 r270 bottom
R15 "Resistor" R0805 124.562,160.5 r270 bottom
R16 "Resistor" R0805 153,135.125 r270 bottom
R17 "Resistor" R0805 126.625,160.5 r270 bottom
R18 "Resistor" R0805 150.937,126.5 r270 bottom
R19 "Resistor" R0805 128.687,160.5 r270 bottom
R20 "Resistor" R0805 155.062,135.125 r270 bottom
R21_1 "Potenciometro" "Header 3x1" 4.687,59.438 r90 top (schematic designator R21)
R21_2 "Potenciometro" "Header 3x1" 30.875,59.438 r90 bottom (schematic designator R21)
R21_3 "Potenciometro" "Header 3x1" 57.062,59.438 r90 bottom (schematic designator R21)
R21_4 "Potenciometro" "Header 3x1" 83.25,59.438 r90 bottom (schematic designator R21)
R21_5 "Potenciometro" "Header 3x1" 109.437,59.438 r90 bottom (schematic designator R21)
R21_6 "Potenciometro" "Header 3x1" 135.625,59.438 r90 bottom (schematic designator R21)
R22_1 "Resistor" R0805 10.25,66.102 r270 bottom (schematic designator R22)
R22_2 "Resistor" R0805 36.43,66.102 r270 bottom (schematic designator R22)
R22_3 "Resistor" R0805 62.617,66.102 r270 bottom (schematic designator R22)
R22_4 "Resistor" R0805 88.805,66.102 r270 bottom (schematic designator R22)
R22_5 "Resistor" R0805 114.992,66.102 r270 bottom (schematic designator R22)
R22_6 "Resistor" R0805 141.18,66.102 r270 bottom (schematic designator R22)
R23_1 "Resistor" R0805 12.375,66.102 r90 bottom (schematic designator R23)
R23_2 "Resistor" R0805 38.563,66.102 r90 bottom (schematic designator R23)
R23_3 "Resistor" R0805 64.75,66.102 r90 bottom (schematic designator R23)
R23_4 "Resistor" R0805 90.938,66.102 r90 bottom (schematic designator R23)
R23_5 "Resistor" R0805 117.125,66.102 r90 bottom (schematic designator R23)
R23_6 "Resistor" R0805 143.312,66.102 r90 bottom (schematic designator R23)
R24_1 "Resistor" R0805 15.216,119.625 r90 bottom (schematic designator R24)
R24_2 "Resistor" R0805 58.063,119.625 r90 bottom (schematic designator R24)
R24_3 "Resistor" R0805 100.791,119.638 r90 bottom (schematic designator R24)
R25_1 "Resistor" R0805 36.778,119.625 r90 bottom (schematic designator R25)
R25_2 "Resistor" R0805 79.688,119.625 r90 bottom (schematic designator R25)
R25_3 "Resistor" R0805 122.416,119.638 r90 bottom (schematic designator R25)
R26_1 "Resistor" R0805 18.216,119.625 r90 bottom (schematic designator R26)
R26_2 "Resistor" R0805 61,119.625 r90 bottom (schematic designator R26)
R26_3 "Resistor" R0805 103.729,119.638 r90 bottom (schematic designator R26)
R27_1 "Resistor" R0805 33.778,119.625 r90 bottom (schematic designator R27)
R27_2 "Resistor" R0805 76.688,119.625 r90 bottom (schematic designator R27)
R27_3 "Resistor" R0805 119.416,119.638 r90 bottom (schematic designator R27)
R28_1 "Resistor" R0805 9.216,119.625 r90 bottom (schematic designator R28)
R28_2 "Resistor" R0805 52.063,119.625 r90 bottom (schematic designator R28)
R28_3 "Resistor" R0805 94.791,119.638 r90 bottom (schematic designator R28)
R29_1 "Resistor" R0805 42.778,119.625 r90 bottom (schematic designator R29)
R29_2 "Resistor" R0805 85.688,119.625 r90 bottom (schematic designator R29)
R29_3 "Resistor" R0805 128.416,119.638 r90 bottom (schematic designator R29)
R30_1 "Resistor" R0805 18.341,112.687 r270 bottom (schematic designator R30)
R30_2 "Resistor" R0805 61.25,112.687 r270 bottom (schematic designator R30)
R30_3 "Resistor" R0805 103.979,112.7 r270 bottom (schematic designator R30)
R31_1 "Resistor" R0805 33.778,112.687 r270 bottom (schematic designator R31)
R31_2 "Resistor" R0805 76.688,112.687 r270 bottom (schematic designator R31)
R31_3 "Resistor" R0805 119.416,112.7 r270 bottom (schematic designator R31)
R32_1 "Potenciometro" "Header 3x1" 6.091,116 r90 top (schematic designator R32)
R32_2 "Potenciometro" "Header 3x1" 49.021,116 r90 top (schematic designator R32)
R32_3 "Potenciometro" "Header 3x1" 91.75,116.012 r90 top (schematic designator R32)
R33_1 "Potenciometro" "Header 3x1" 46.091,116 r90 top (schematic designator R33)
R33_2 "Potenciometro" "Header 3x1" 88.812,116.023 r90 top (schematic designator R33)
R33_3 "Potenciometro" "Header 3x1" 131.541,116.035 r90 top (schematic designator R33)
R34_1 "Resistor" R0805 6.091,112.687 r90 bottom (schematic designator R34)
R34_2 "Resistor" R0805 49.021,112.687 r90 bottom (schematic designator R34)
R34_3 "Resistor" R0805 91.75,112.7 r90 bottom (schematic designator R34)
R35_1 "Resistor" R0805 46.153,112.687 r90 bottom (schematic designator R35)
R35_2 "Resistor" R0805 88.875,112.687 r90 bottom (schematic designator R35)
R35_3 "Resistor" R0805 131.604,112.7 r90 bottom (schematic designator R35)
R36_1 "Resistor" R0805 12.341,112.687 r270 bottom (schematic designator R36)
R36_2 "Resistor" R0805 55.063,112.687 r270 bottom (schematic designator R36)
R36_3 "Resistor" R0805 97.791,112.7 r270 bottom (schematic designator R36)
R37_1 "Resistor" R0805 39.778,112.687 r270 bottom (schematic designator R37)
R37_2 "Resistor" R0805 82.688,112.687 r270 bottom (schematic designator R37)
R37_3 "Resistor" R0805 125.416,112.7 r270 bottom (schematic designator R37)
R38 "Resistor" R0805 119.562,187.562 r90 bottom
R39 "Resistor" R0805 125.937,187.562 r90 bottom
R40 "Resistor" R0805 123.812,187.562 r270 bottom
R41 "Resistor" R0805 121.687,187.562 r90 bottom
R42 "Resistor" R0805 103.812,187.187 r270 bottom
R43 "Resistor" R0805 125.937,182 r90 bottom
R44 "Resistor" R0805 123.812,182 r270 bottom
R45 "Resistor" R0805 117.437,182 r90 bottom
R46 "Resistor" R0805 101.687,187.187 r270 bottom
R47 "Resistor" R0805 103.812,182 r90 bottom
R48 "Resistor" R0805 121.687,182 r270 bottom
R49 "Potenciometro" "Header 3x1" 99.25,182.147 r90 top
R50 "Resistor" R0805 101.687,182 r90 bottom
R51 "Resistor" R0805 8.063,49.292 r270 bottom
R52 "Resistor" R0805 5.125,54.43 r90 bottom
R53 "Resistor" R0805 19.125,49.292 r270 bottom
R54 "Resistor" R0805 21.75,54.43 r90 bottom
R55 "Resistor" R0805 34.25,49.292 r270 bottom
R56 "Resistor" R0805 31.313,54.367 r90 bottom
R57 "Resistor" R0805 45.313,49.292 r270 bottom
R58 "Resistor" R0805 47.937,54.43 r90 bottom
R59 "Resistor" R0805 60.437,49.292 r270 bottom
R60 "Resistor" R0805 57.5,54.367 r90 bottom
R61 "Resistor" R0805 71.5,49.292 r270 bottom
R62 "Resistor" R0805 74.125,54.562 r90 bottom
R63 "Resistor" R0805 86.625,49.292 r270 bottom
R64 "Resistor" R0805 83.688,54.367 r90 bottom
R65 "Resistor" R0805 97.688,49.292 r270 bottom
R66 "Resistor" R0805 100.312,54.5 r90 bottom
R67 "Resistor" R0805 112.812,49.292 r270 bottom
R68 "Resistor" R0805 109.875,54.367 r90 bottom
R69 "Resistor" R0805 123.875,49.292 r270 bottom
R70 "Resistor" R0805 126.5,54.43 r90 bottom
R71 "Resistor" R0805 139,49.312 r270 bottom
R72 "Resistor" R0805 136.062,54.367 r90 bottom
R73 "Resistor" R0805 150.063,49.292 r270 bottom
R74 "Resistor" R0805 152.687,54.43 r90 bottom
R75 "Resistor" R0805 153.137,86.449 r0 bottom
R76 "Resistor" R0805 153.137,84.327 r180 bottom
R77 "Resistor" R0805 153.137,82.202 r0 bottom
R78 "Resistor" R0805 4.875,90.25 r90 bottom
R79 "Resistor" R0805 4.875,80.125 r90 bottom
R80 "Resistor" R0805 4.875,85.188 r270 bottom
R81 "Resistor" R0805 9.125,80.125 r90 bottom
R82 "Resistor" R0805 9.125,85.188 r90 bottom
R83 "Resistor" R0805 9.125,90.25 r90 bottom
R84 "Resistor" R0805 4.875,94.813 r90 bottom
R85 "Resistor" R0805 17.625,80.037 r90 bottom
R86 "Resistor" R0805 17.625,85.188 r90 bottom
R87 "Resistor" R0805 17.625,90.25 r90 bottom
R88 "Resistor" R0805 13.375,80.125 r90 bottom
R89 "Resistor" R0805 28.75,90.188 r90 bottom
R90 "Resistor" R0805 28.75,80.037 r90 bottom
R91 "Resistor" R0805 28.75,85.125 r270 bottom
R92 "Resistor" R0805 33,80.062 r90 bottom
R93 "Resistor" R0805 33,85.125 r90 bottom
R94 "Resistor" R0805 33,90.188 r90 bottom
R95 "Resistor" R0805 28.75,94.75 r90 bottom
R96 "Resistor" R0805 54.938,90.188 r90 bottom
R97 "Resistor" R0805 41.5,80.062 r90 bottom
R98 "Resistor" R0805 41.5,85.125 r90 bottom
R99 "Resistor" R0805 41.5,90.188 r90 bottom
R100 "Resistor" R0805 37.25,80.062 r90 bottom
R101 "Resistor" R0805 54.938,80.037 r90 bottom
R102 "Resistor" R0805 54.938,85.125 r270 bottom
R103 "Resistor" R0805 59.188,80.062 r90 bottom
R104 "Resistor" R0805 59.188,85.125 r90 bottom
R105 "Resistor" R0805 59.188,90.188 r90 bottom
R106 "Resistor" R0805 54.938,94.75 r90 bottom
R107 "Resistor" R0805 67.687,80.062 r90 bottom
R108 "Resistor" R0805 67.687,85.125 r90 bottom
R109 "Resistor" R0805 67.687,90.188 r90 bottom
R110 "Resistor" R0805 63.438,80.062 r90 bottom
R111 "Resistor" R0805 81.125,90.162 r90 bottom
R112 "Resistor" R0805 81.125,80.037 r90 bottom
R113 "Resistor" R0805 81.125,85.1 r270 bottom
R114 "Resistor" R0805 85.375,80.037 r90 bottom
R115 "Resistor" R0805 85.375,85.1 r90 bottom
R116 "Resistor" R0805 85.375,90.162 r90 bottom
R117 "Resistor" R0805 81.125,94.725 r90 bottom
R118 "Resistor" R0805 93.875,80.037 r90 bottom
R119 "Resistor" R0805 93.875,85.1 r90 bottom
R120 "Resistor" R0805 93.875,90.162 r90 bottom
R121 "Resistor" R0805 89.625,80.037 r90 bottom
R122 "Resistor" R0805 107.309,90.162 r90 bottom
R123 "Resistor" R0805 107.309,80.037 r90 bottom
R124 "Resistor" R0805 107.309,85.1 r270 bottom
R125 "Resistor" R0805 111.174,80.037 r90 bottom
R126 "Resistor" R0805 111.174,85.1 r90 bottom
R127 "Resistor" R0805 111.174,90.162 r90 bottom
R128 "Resistor" R0805 107.309,94.725 r90 bottom
R129 "Resistor" R0805 120.049,80.037 r90 bottom
R130 "Resistor" R0805 120.049,85.1 r90 bottom
R131 "Resistor" R0805 120.049,90.162 r90 bottom
R132 "Resistor" R0805 115.674,80.037 r90 bottom
R133 "Resistor" R0805 133.563,90.162 r90 bottom
R134 "Resistor" R0805 133.563,80.062 r90 bottom
R135 "Resistor" R0805 133.563,85.1 r270 bottom
R136 "Resistor" R0805 137.438,80.062 r90 bottom
R137 "Resistor" R0805 137.438,85.1 r90 bottom
R138 "Resistor" R0805 137.438,90.162 r90 bottom
R139 "Resistor" R0805 133.563,94.725 r90 bottom
R140 "Resistor" R0805 146.25,80.062 r90 bottom
R141 "Resistor" R0805 146.25,85.1 r90 bottom
R142 "Resistor" R0805 146.25,90.162 r90 bottom
R143 "Resistor" R0805 141.938,80.062 r90 bottom
R144_1 "Resistor" R0805 10.25,49.292 r90 bottom (schematic designator R144)
R144_2 "Resistor" R0805 36.43,49.292 r90 bottom (schematic designator R144)
R144_3 "Resistor" R0805 62.617,49.292 r90 bottom (schematic designator R144)
R144_4 "Resistor" R0805 88.805,49.292 r90 bottom (schematic designator R144)
R144_5 "Resistor" R0805 114.992,49.292 r90 bottom (schematic designator R144)
R144_6 "Resistor" R0805 141.18,49.292 r90 bottom (schematic designator R144)
R145_1 "Resistor" R0805 7.688,58.68 r270 bottom (schematic designator R145)
R145_2 "Resistor" R0805 33.875,58.68 r270 bottom (schematic designator R145)
R145_3 "Resistor" R0805 60.063,58.68 r270 bottom (schematic designator R145)
R145_4 "Resistor" R0805 86.25,58.68 r270 bottom (schematic designator R145)
R145_5 "Resistor" R0805 112.437,58.68 r270 bottom (schematic designator R145)
R145_6 "Resistor" R0805 138.625,58.68 r270 bottom (schematic designator R145)
R146_1 "Resistor" R0805 19.125,58.68 r90 bottom (schematic designator R146)
R146_2 "Resistor" R0805 45.313,58.68 r90 bottom (schematic designator R146)
R146_3 "Resistor" R0805 71.5,58.68 r90 bottom (schematic designator R146)
R146_4 "Resistor" R0805 97.688,58.68 r90 bottom (schematic designator R146)
R146_5 "Resistor" R0805 123.875,58.68 r90 bottom (schematic designator R146)
R146_6 "Resistor" R0805 150.063,58.68 r90 bottom (schematic designator R146)
R147_1 "Resistor" R0805 17,49.292 r90 bottom (schematic designator R147)
R147_2 "Resistor" R0805 43.188,49.292 r90 bottom (schematic designator R147)
R147_3 "Resistor" R0805 69.375,49.292 r90 bottom (schematic designator R147)
R147_4 "Resistor" R0805 95.563,49.292 r90 bottom (schematic designator R147)
R147_5 "Resistor" R0805 121.75,49.292 r90 bottom (schematic designator R147)
R147_6 "Resistor" R0805 147.938,49.292 r90 bottom (schematic designator R147)
SP1 "PRTR5V0U2X" SOT143B 15.75,186.938 r180 bottom
SW1 "TAC_SWITCH_4" TAC_SW_4 47.441,185.712 r0 top
SW2 "OnOff_SW_SPST" SPST_TH_SW_Button_90º 21.728,187.397 r180 top
SW3_1 "Slide_SW_DPDT" DPDT_SMD_SLIDE_90º 19.75,3.25 r180 bottom (schematic designator SW3)
SW3_2 "Slide_SW_DPDT" DPDT_SMD_Slide_90º 45.937,3.25 r180 bottom (schematic designator SW3)
SW3_3 "Slide_SW_DPDT" DPDT_SMD_Slide_90º 72.125,3.25 r180 bottom (schematic designator SW3)
SW3_4 "Slide_SW_DPDT" DPDT_SMD_Slide_90º 98.312,3.25 r180 bottom (schematic designator SW3)
SW3_5 "Slide_SW_DPDT" DPDT_SMD_Slide_90º 124.5,3.25 r180 bottom (schematic designator SW3)
SW3_6 "Slide_SW_DPDT" DPDT_SMD_Slide_90º 150.687,3.25 r180 bottom (schematic designator SW3)
SW4_1 "TAC_SWITCH_4" SPDT_SMD_90º 6.75,6.25 r90 bottom (schematic designator SW4)
SW4_2 "TAC_SWITCH_4" SPDT_SMD_90º 32.937,6.25 r90 bottom (schematic designator SW4)
SW4_3 "TAC_SWITCH_4" SPDT_SMD_90º 59.125,6.25 r90 bottom (schematic designator SW4)
SW4_4 "TAC_SWITCH_4" SPDT_SMD_90º 85.312,6.25 r90 bottom (schematic designator SW4)
SW4_5 "TAC_SWITCH_4" SPDT_SMD_90º 111.5,6.25 r90 bottom (schematic designator SW4)
SW4_6 "TAC_SWITCH_4" SPDT_SMD_90º 137.687,6.25 r90 bottom (schematic designator SW4)
SW5_1 "TAC_SWITCH_4" "Header 2x1" 21.75,60.875 r270 top (schematic designator SW5)
SW5_2 "TAC_SWITCH_4" "Header 2x1" 47.937,60.875 r270 top (schematic designator SW5)
SW5_3 "TAC_SWITCH_4" "Header 2x1" 74.125,60.875 r270 top (schematic designator SW5)
SW5_4 "TAC_SWITCH_4" "Header 2x1" 100.312,60.875 r270 top (schematic designator SW5)
SW5_5 "TAC_SWITCH_4" "Header 2x1" 126.5,60.875 r270 top (schematic designator SW5)
SW5_6 "TAC_SWITCH_4" "Header 2x1" 152.688,60.875 r270 top (schematic designator SW5)
U1 "LM1117" SOT223 8.5,165.5 r90 bottom
U2 "STM32F401RB" LQFP64-10x10mm 21.877,142.937 r135 bottom value=Value
U3 "Part Number: PCM3168A" PAP64_7X7P26 147.5,147.687 r315 bottom
U4_1 "OPA4134" TSSOP-14 26.028,112.812 r0 bottom (schematic designator U4)
U4_2 "OPA4134" TSSOP-14 68.875,112.812 r0 bottom (schematic designator U4)
U4_3 "OPA4134" TSSOP-14 111.604,112.825 r0 bottom (schematic designator U4)
U5 "Opamp_x2" D8 109.937,184.875 r180 bottom
U6 "LT8330" S6 153.2,89.982 r90 bottom
U7 "OPA4134" TSSOP-14 47.313,100.687 r0 bottom
U8 "OPA2134" D8 117.938,95.75 r0 bottom
Y1 "XTAL" XTAL_HC49/US_HS 30.775,136.175 r225 top

## Footprints (in the part's own frame and the unit in brackets; to place one, negate y for a bottom-side part, rotate by r counter-clockwise, add the part's x,y. Pads: shape width x height; smd on the part's side, far side on the other; paste and mask are expansions set on the pad)
C0805 [mm] "Capacitor SMD 0805"
  rect 1.3x1.5 smd: 1(-0.95,0) 2(0.95,0)
  silkscreen extent -1.07,-0.95 1.07,0.95, body extent -1,-0.62 1,0.63, height 0.8
CAP_ELECTROLYTIC [mil]
  rect 140x75 smd paste+0 mask+0: 1(-137,0) 2(137,0)
  silkscreen extent -172,-172 172,172
CAP_Electrolytic [mil]
  rect 140x75 smd paste+0 mask+0: 1(-137,0) 2(137,0)
  silkscreen extent -173,-173 173,173
"Combo XLR Jack" [mil]
  round 85 hole 47: 1(724,-240) 2(724,240) 3(724,0) G(437,0) R(571,-205) S(437,205) T(984,362)
  round 0 hole 83 unplated: Mount(276,-157)
  silkscreen extent 0,-500 1276,500
D8 [mil]
  rect 86x22 smd paste+0 mask+0: 1(-93,75) 2(-93,25) 3(-93,-25) 4(-93,-75) 5(93,-75) 6(93,-25) 7(93,25) 8(93,75)
  silkscreen extent -122,-104 84,127
DPDT_SMD_SLIDE_90º [mm]
  rect 1x1.6 smd: 1(-2.5,1.2) 2(0,1.2) 3(2.5,1.2) 4(-2.5,-1.2) 5(0,-1.2) 6(2.5,-1.2)
  round 0 hole 0.9 unplated: 7(-3.4,0) 8(3.4,0)
  silkscreen extent -4.5,-1.8 4.5,1.8
DPDT_SMD_Slide_90º [mm]
  rect 1x1.6 smd: 1(-2.5,1.2) 2(0,1.2) 3(2.5,1.2) 4(-2.5,-1.2) 5(0,-1.2) 6(2.5,-1.2)
  round 0 hole 0.9 unplated: 7(-3.4,0) 8(3.4,0)
  silkscreen extent -4.5,-1.8 4.5,1.8
"Header 2x1" [mil]
  rect 60x60 hole 25: 1(0,0)
  round 60 hole 25: 2(100,0)
  silkscreen extent -50,-50 150,50
"Header 3x1" [mil]
  rect 60x60 hole 25: 1(0,0)
  round 60 hole 25: 2(100,0) 3(200,0)
  silkscreen extent -50,-50 252,50
IDC10M [mm] "10 pin IDC male header connector"
  rect 1.8x1.8 hole 1: 1(-5.08,-1.27)
  round 1.8 hole 1: 2(-5.08,1.27) 3(-2.54,-1.27) 4(-2.54,1.27) 5(0,-1.27) 6(0,1.27) 7(2.54,-1.27) 8(2.54,1.27) 9(5.08,-1.27) 10(5.08,1.27)
  silkscreen extent -10.15,-4.4 10.15,4.4, body extent -10.15,-4.4 10.15,4.7, height 9.3
"Jack 3.5mm" [mil]
  oval 30x85 hole 47 slot 16 at 0 deg: 1(79,0) 4(512,-157)
  oval 85x30 hole 16 slot 47 at 0 deg: 2(386,205) 3(330,98) 5(213,-177)
  silkscreen extent 0,-217 600,236
L0805 [mm] "Capacitor SMD 0805"
  rect 1.3x1.5 smd: 1(-0.95,0) 2(0.95,0)
  silkscreen extent -1.07,-0.95 1.07,0.95, body extent -1,-0.62 1,0.63, height 0.8
LQFP64-10x10mm [mm]
  rect 1.194x0.305 smd: 1(-5.75,3.75) 2(-5.75,3.25) 3(-5.75,2.75) 4(-5.75,2.25) 5(-5.75,1.75) 6(-5.75,1.25) 7(-5.75,0.75) 8(-5.75,0.25) 9(-5.75,-0.25) 10(-5.75,-0.75) 11(-5.75,-1.25) 12(-5.75,-1.75) 13(-5.75,-2.25) 14(-5.75,-2.75) 15(-5.75,-3.25) 16(-5.75,-3.75) 33(5.75,-3.75) 34(5.75,-3.25) 35(5.75,-2.75) 36(5.75,-2.25) 37(5.75,-1.75) 38(5.75,-1.25) 39(5.75,-0.75) 40(5.75,-0.25) 41(5.75,0.25) 42(5.75,0.75) 43(5.75,1.25) 44(5.75,1.75) 45(5.75,2.25) 46(5.75,2.75) 47(5.75,3.25) 48(5.75,3.75)
  rect 0.305x1.194 smd: 17(-3.75,-5.75) 18(-3.25,-5.75) 19(-2.75,-5.75) 20(-2.25,-5.75) 21(-1.75,-5.75) 22(-1.25,-5.75) 23(-0.75,-5.75) 24(-0.25,-5.75) 25(0.25,-5.75) 26(0.75,-5.75) 27(1.25,-5.75) 28(1.75,-5.75) 29(2.25,-5.75) 30(2.75,-5.75) 31(3.25,-5.75) 32(3.75,-5.75) 49(3.75,5.75) 50(3.25,5.75) 51(2.75,5.75) 52(2.25,5.75) 53(1.75,5.75) 54(1.25,5.75) 55(0.75,5.75) 56(0.25,5.75) 57(-0.25,5.75) 58(-0.75,5.75) 59(-1.25,5.75) 60(-1.75,5.75) 61(-2.25,5.75) 62(-2.75,5.75) 63(-3.25,5.75) 64(-3.75,5.75)
  silkscreen extent -7.36,-5.13 5.13,5.13
PAP64_7X7P26 [mm]
  rect 1.461x0.219 smd paste+0 mask+0: 1(-5.725,3.75) 2(-5.725,3.25) 3(-5.725,2.75) 4(-5.725,2.25) 5(-5.725,1.75) 6(-5.725,1.25) 7(-5.725,0.75) 8(-5.725,0.25) 9(-5.725,-0.25) 10(-5.725,-0.75) 11(-5.725,-1.25) 12(-5.725,-1.75) 13(-5.725,-2.25) 14(-5.725,-2.75) 15(-5.725,-3.25) 16(-5.725,-3.75) 33(5.725,-3.75) 34(5.725,-3.25) 35(5.725,-2.75) 36(5.725,-2.25) 37(5.725,-1.75) 38(5.725,-1.25) 39(5.725,-0.75) 40(5.725,-0.25) 41(5.725,0.25) 42(5.725,0.75) 43(5.725,1.25) 44(5.725,1.75) 45(5.725,2.25) 46(5.725,2.75) 47(5.725,3.25) 48(5.725,3.75)
  rect 0.219x1.461 smd paste+0 mask+0: 17(-3.75,-5.725) 18(-3.25,-5.725) 19(-2.75,-5.725) 20(-2.25,-5.725) 21(-1.75,-5.725) 22(-1.25,-5.725) 23(-0.75,-5.725) 24(-0.25,-5.725) 25(0.25,-5.725) 26(0.75,-5.725) 27(1.25,-5.725) 28(1.75,-5.725) 29(2.25,-5.725) 30(2.75,-5.725) 31(3.25,-5.725) 32(3.75,-5.725) 49(3.75,5.725) 50(3.25,5.725) 51(2.75,5.725) 52(2.25,5.725) 53(1.75,5.725) 54(1.25,5.725) 55(0.75,5.725) 56(0.25,5.725) 57(-0.25,5.725) 58(-0.75,5.725) 59(-1.25,5.725) 60(-1.75,5.725) 61(-2.25,5.725) 62(-2.75,5.725) 63(-3.25,5.725) 64(-3.75,5.725)
  rect 7.26x7 smd paste-3.617 mask-3.619: EPAD(0,0)
  silkscreen extent -7.93,-7.11 7.11,7.11, body extent 0,0 0.25,0.25, height 0.25
R0805 [mm] "Resistor SMD 0805"
  rect 1.3x1.5 smd: 1(-0.95,0) 2(0.95,0)
  silkscreen extent -1.07,-0.95 1.07,0.95, body extent -1,-0.63 1,0.63, height 0.43
S6 [mil]
  rect 48x20 smd paste+0 mask+0: 1(-45,37.4) 2(-45,0) 3(-45,-37.4) 4(45,-37.4) 5(45,0) 6(45,37.4)
  silkscreen extent -55,-62 40,80
SMD_0805_Diodo [mm] "Diodo SMD"
  rect 1.1x1.25 smd: 1(0,0) 2(2.5,0)
  silkscreen extent -0.38,-0.89 2.92,0.89
SOD128 [mil]
  rect 53.5x18 smd paste+0 mask+0: 1(-40.25,0) 2(40.25,0)
  silkscreen extent -142,-32 75,32, body extent -75,-30 75,30, height 20
SOT23 [mm]
  rect 1.4x1.4 smd: 1(1.1,-1.3)
  rect 1.2x1.4 smd: 2(-1.1,-1.3)
  rect 2.8x1.4 smd: 3(0,1.3)
  silkscreen extent -2.25,-2.3 2.25,2.3, body extent -1.5,-1.8 1.5,1.8, height 1.4
SOT143B [mm]
  rect 1x0.8 smd: 1(-0.75,-0.85)
  rect 0.6x0.8 smd: 2(0.95,-0.85) 3(0.95,0.85) 4(-0.95,0.85)
  silkscreen extent -1.45,-0.65 1.45,0.65
SOT223 [mm]
  rect 0.95x2.15 smd: 1(-2.3,-2.9) 2(0,-2.9) 3(2.3,-2.9)
  rect 3.75x2.15 smd: 4(0,2.9)
  silkscreen extent -3.56,-4.42 3.56,4.72, body extent -3.05,-3.17 3.05,3.68, height 1.7
SPDT_SMD_90º [mm] "TAC SWITCH de 4"
  rect 1.7x0.7 smd: 1(3.85,1.9) 2(3.85,-0.64) 3(3.85,-3.18)
  rect 1.1x1.55 smd: 4(-1.905,4.875) 5(1.905,4.875) 6(-1.905,-4.875) 7(1.905,-4.875)
  silkscreen extent -4.75,-4.25 4.2,4.25
SPST_TH_SW_Button_90º [mil]
  round 80 hole 43: 1(100,100) 2(-100,100)
  round 0 hole 43: 3(100,-100)
  round 0 hole 43 unplated: 4(-100,-100)
  silkscreen extent -160,-158 160,100
TAC_SW_4 [mm] "TAC SWITCH de 4"
  round 2 hole 1.1: 1(-3.25,-2.25) 2(-3.25,2.25) 2(3.25,2.25)
  rrect50% 2x2 hole 1.1: 1(3.25,-2.25)
  silkscreen extent -3.25,-3 3.25,3, body extent -3.87,-3.01 3.87,3.02, height 5.01
Track_8mil [mil] "Track 8 mils"
  rect 4x8 smd paste+0 mask+0: 1(-1.97,0)
  rect 4x8 smd mask+0: 2(1.97,0)
TSSOP-14 [mil]
  rect 66x14 smd paste+0 mask+0: 1(-111,76.77) 2(-111,51.18) 3(-111,25.59) 4(-111,0) 5(-111,-25.59) 6(-111,-51.18) 7(-111,-76.77) 8(111,-76.77) 9(111,-51.18) 10(111,-25.59) 11(111,0) 12(111,25.59) 13(111,51.18) 14(111,76.77)
  silkscreen extent -130,-106 94,125
"USB Type B" [mm] "Molex 67068-XX1X"
  round 1.6 hole 1: 1(1.25,2.355) 2(-1.25,2.355) 3(-1.25,0.355) 4(1.25,0.355)
  round 0 hole 1.65 slot 0.65 at 0 deg unplated: 5(-5.55,-2.355) 6(5.55,-2.355)
XTAL_HC49/US_HS [mm]
  oval 1.8x3 hole 1: 1(-2.44,0) 2(2.44,0)
  silkscreen extent -5.67,-2.32 5.67,2.32, body extent -5.59,-2.29 5.59,2.29, height 1